# Altium PCB USB-C Power Delivery Board.PcbDoc
Units mm, origin at the board's own origin, x right, y up, seen from the top; angles counter-clockwise.
Board outline 48.4 x 56.1 mm, 4 copper layers (Top Layer, Int1 (GND), Int2 (PWR), Bottom Layer), stack 1.591 mm thick; 72 components, 47 nets, 275 pads, 146 vias.
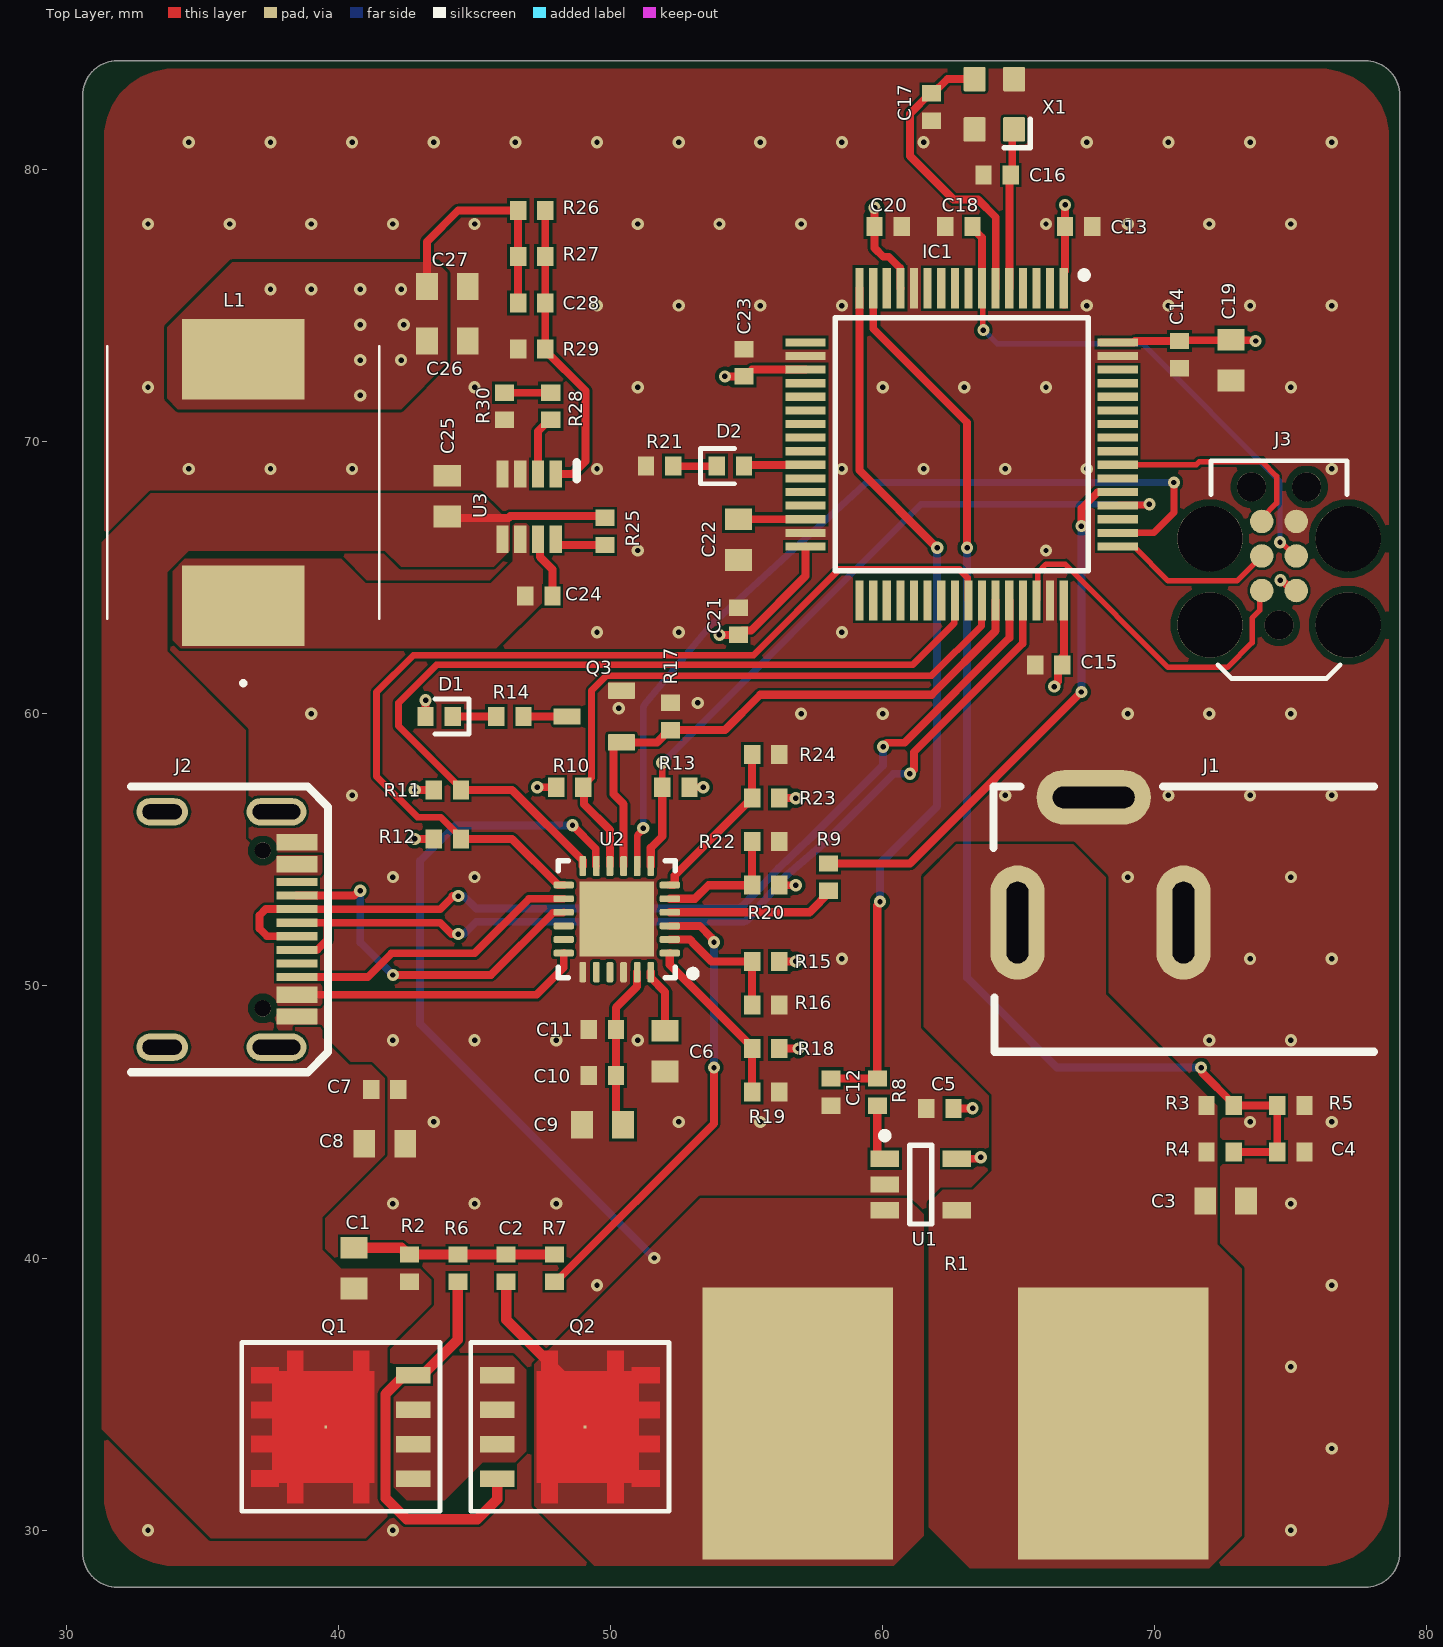
[diagram p0: Top Layer view]
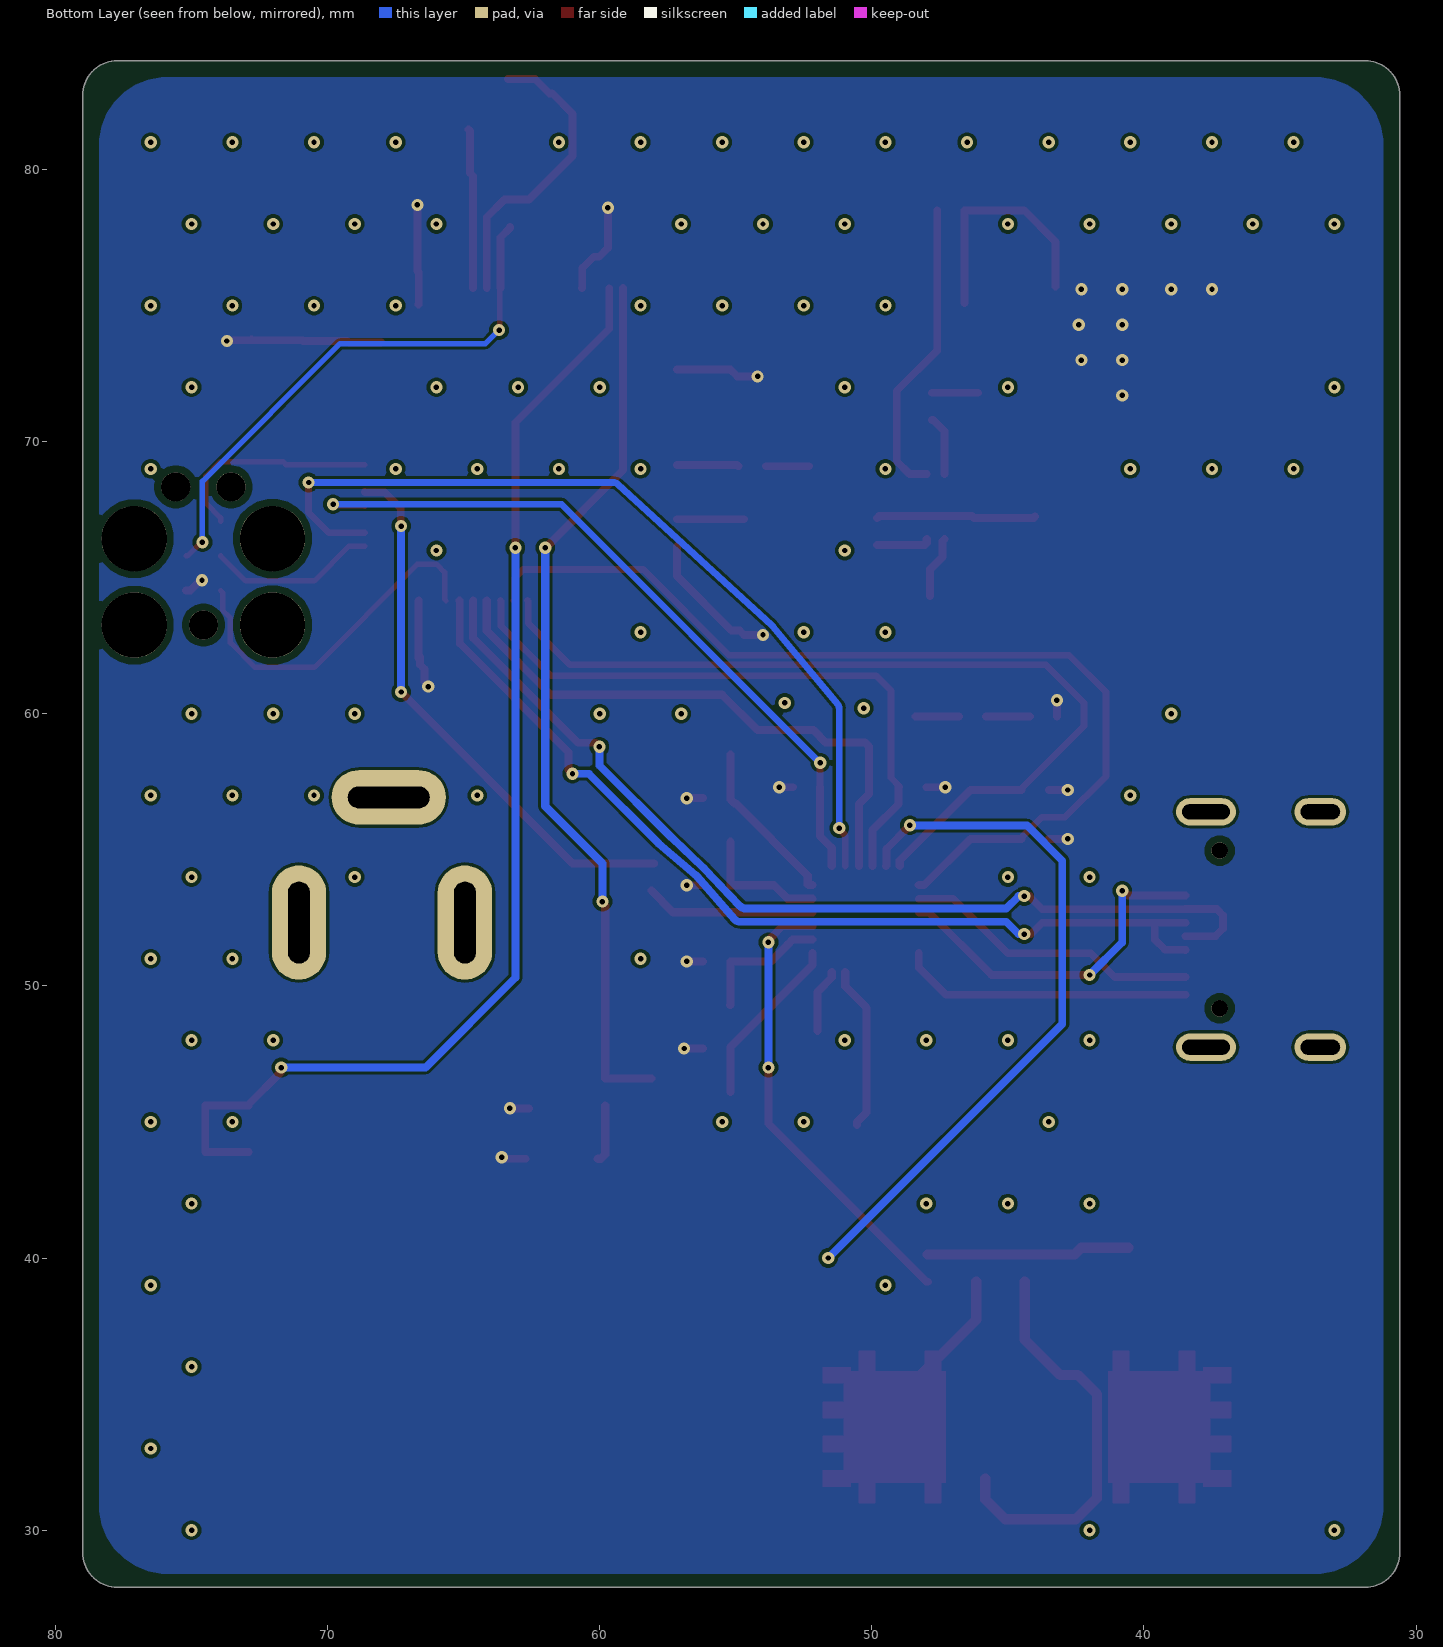
[diagram p1: Bottom Layer view, seen from below]
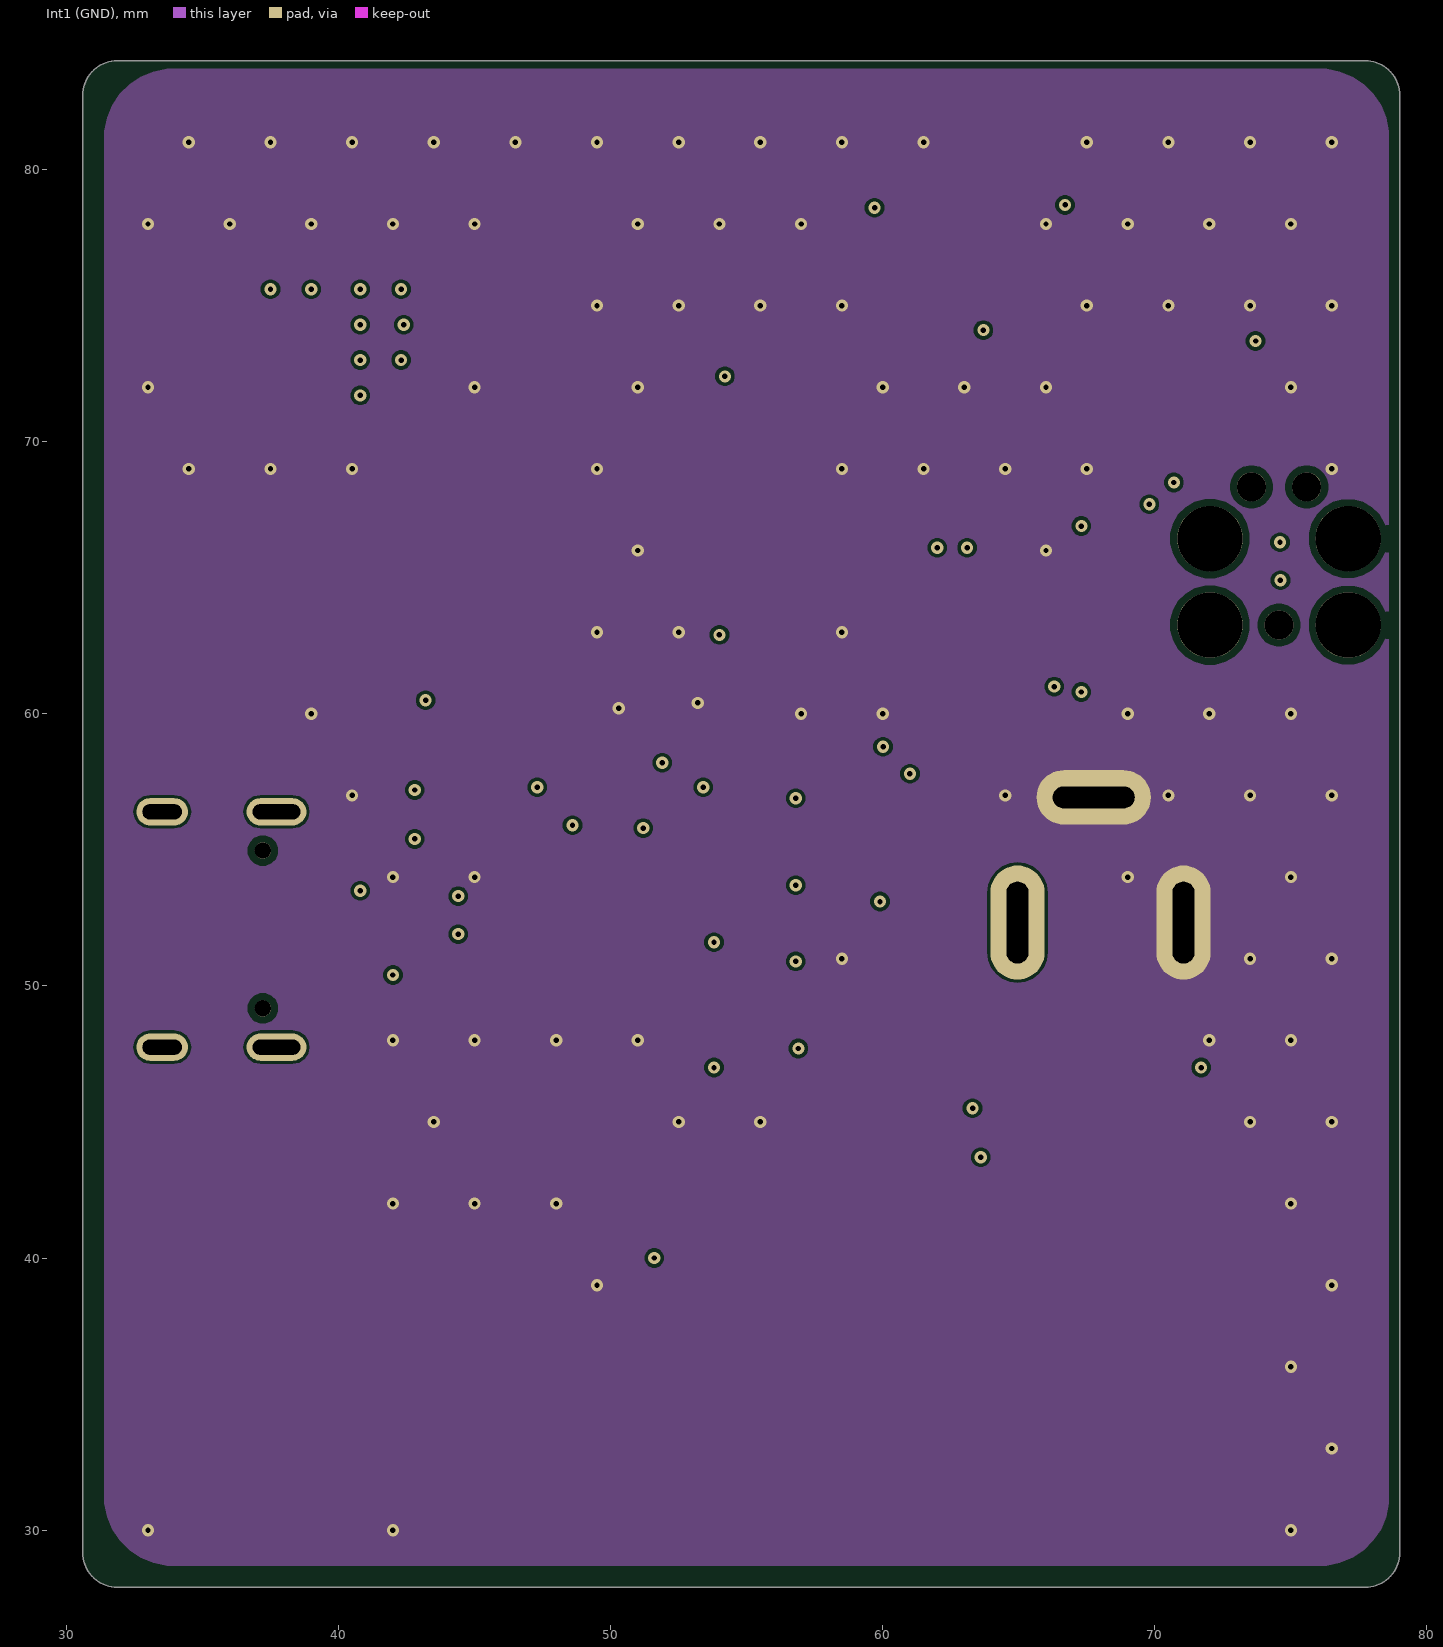
[diagram p2: Int1 (GND)]
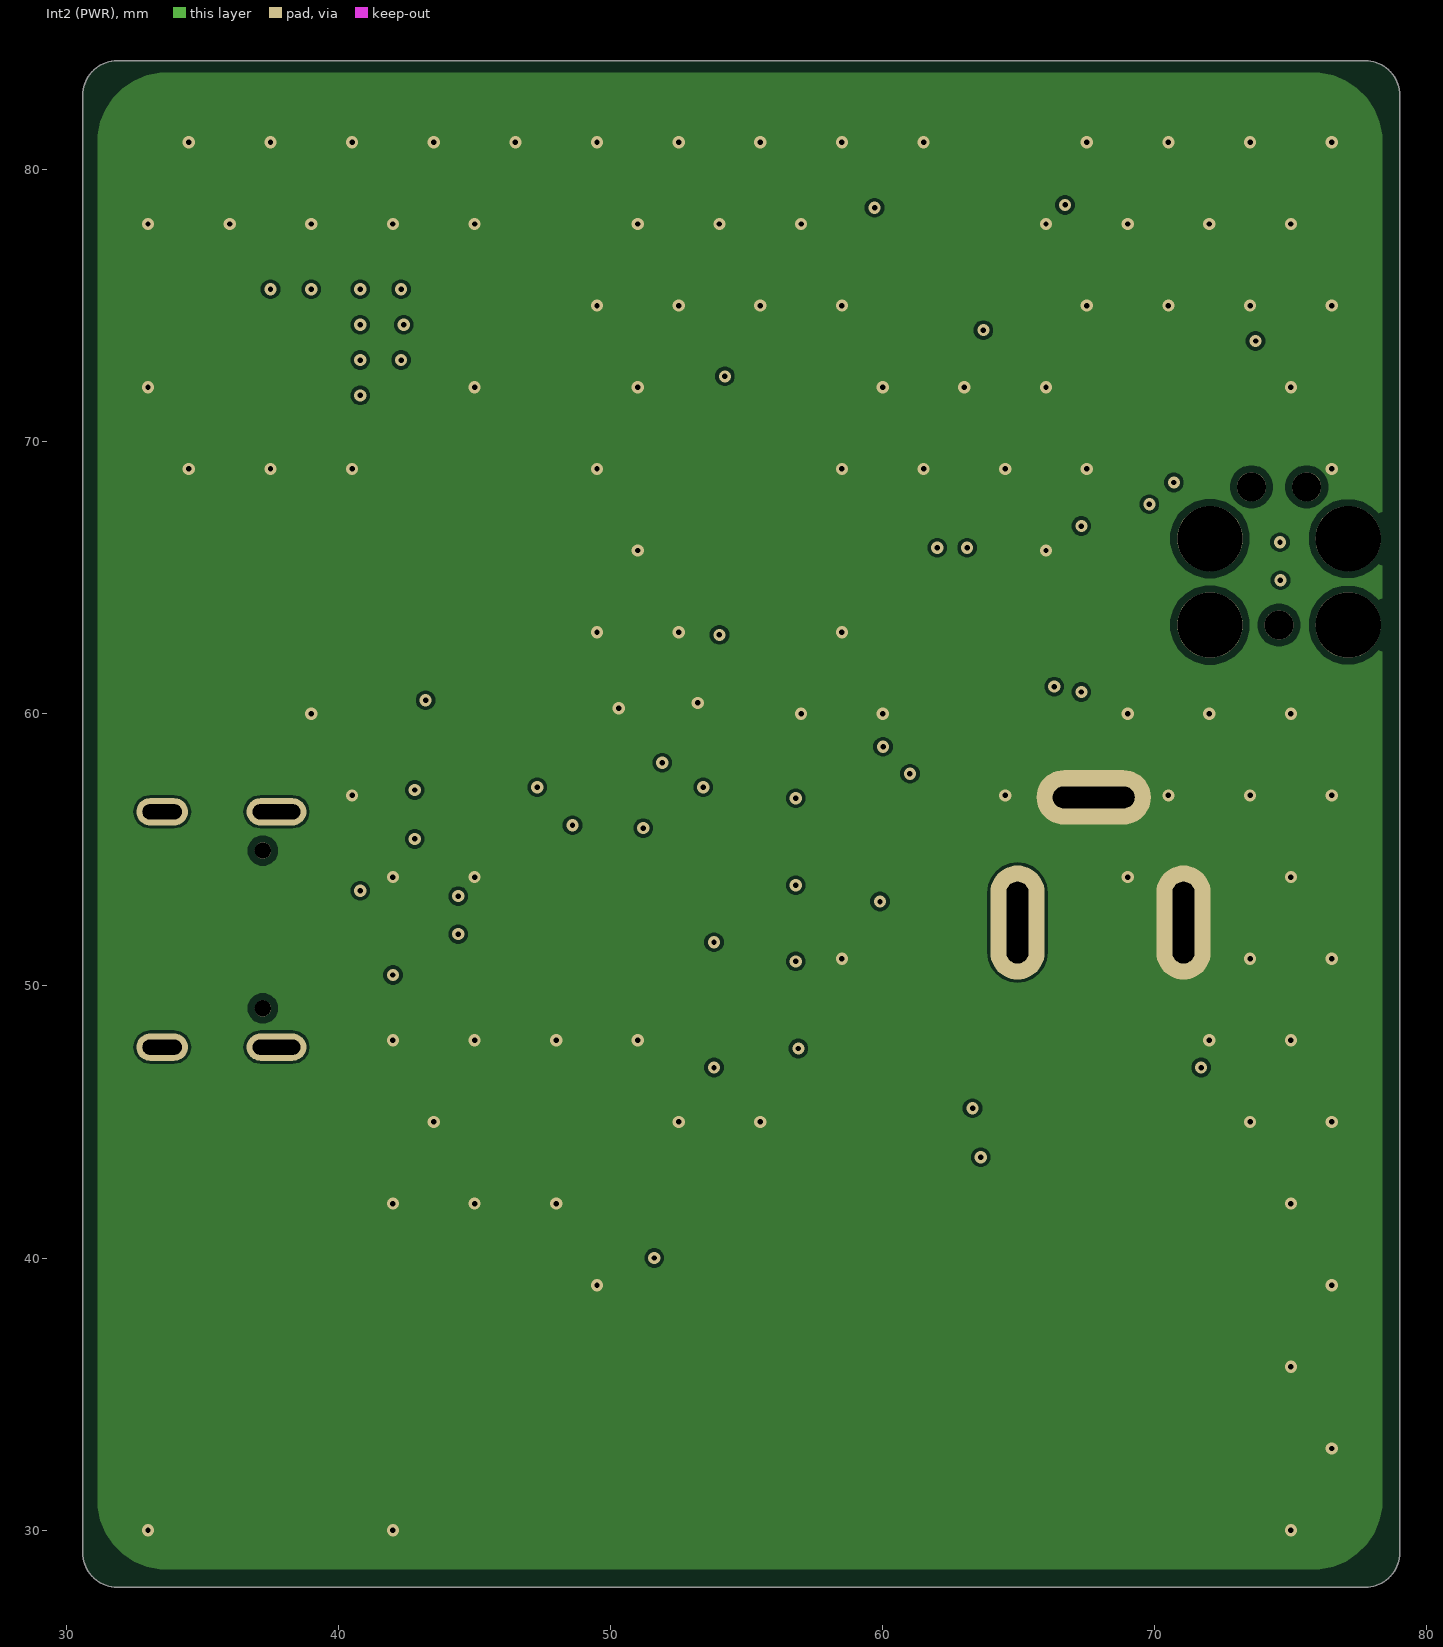
[diagram p3: Int2 (PWR)]
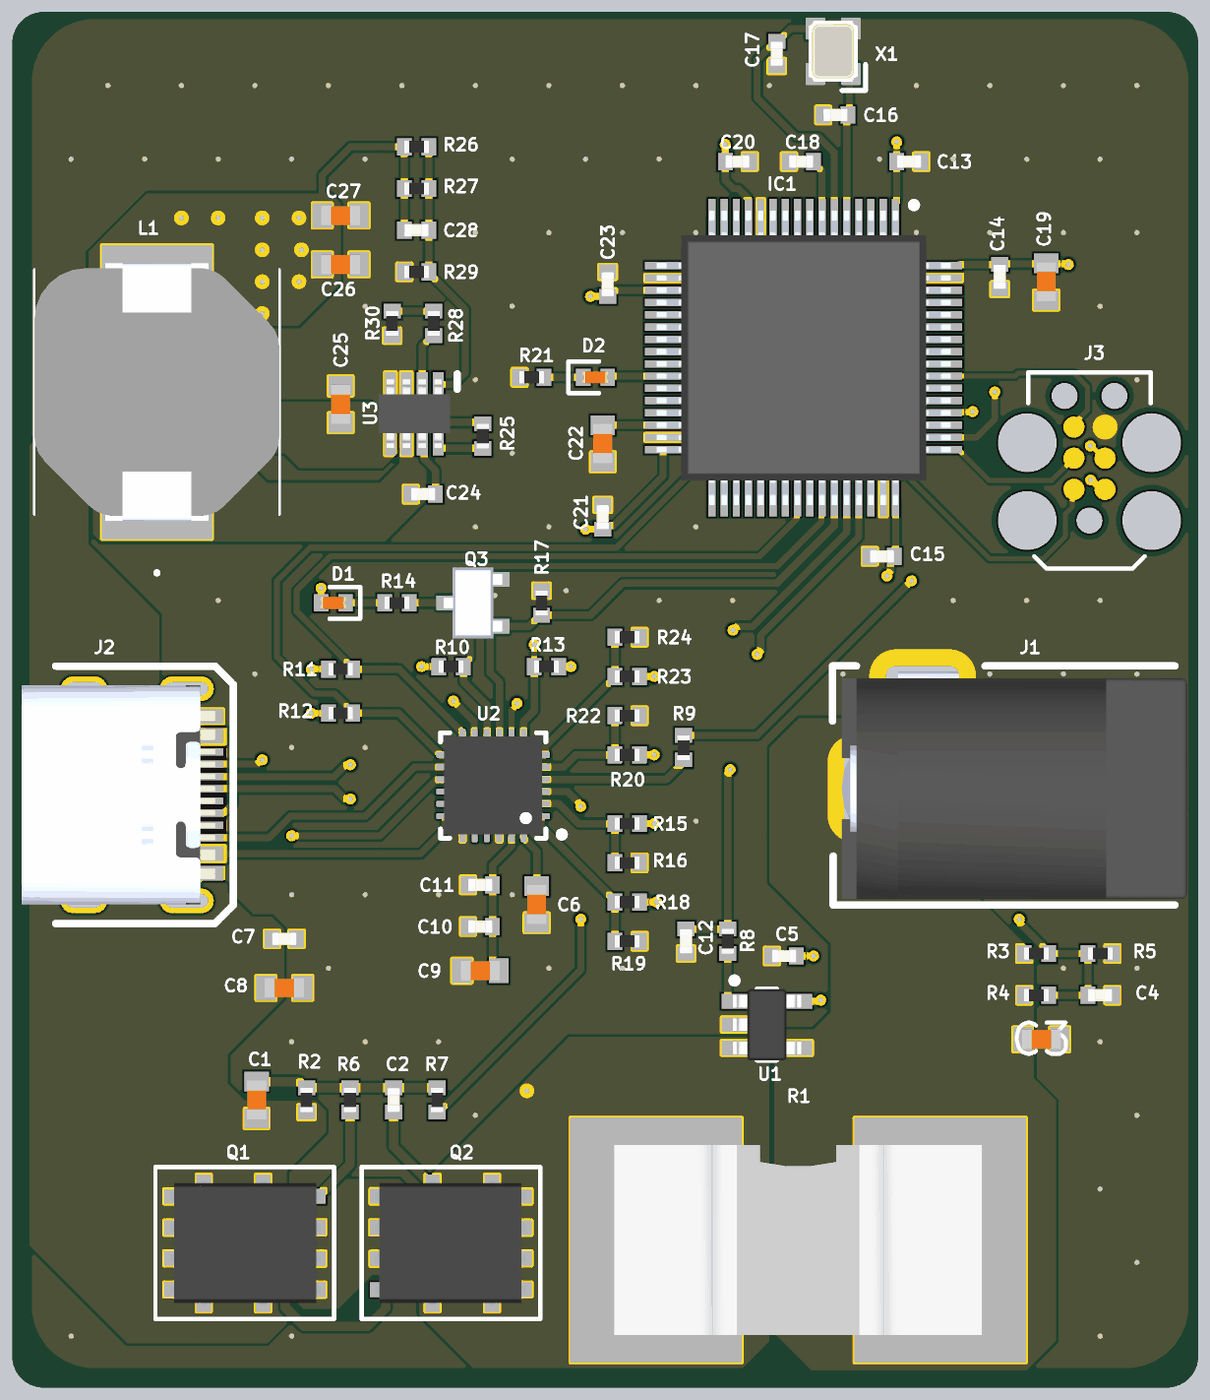
[diagram p4: 3D render of the assembled board from above, using the file's embedded part models]

## Layer stack, top to bottom
Top Solder: solder mask 0.0254, SM-001, Dk 4
Top Layer: signal copper 0.035
Dielectric 1: prepreg 0.2104, PP-017, Dk 4.3
Int1 (GND): signal copper 0.0175
Dielectric 3: core 1.065, Core-039, Dk 4.8
Int2 (PWR): signal copper 0.0175
Dielectric 5: prepreg 0.2104, PP-017, Dk 4.3
Bottom Layer: signal copper 0.035
Bottom Solder: solder mask 0.0254, SM-001, Dk 4

## Board outline
30.6,29.17 30.6,82.73 cw(c31.87,82.73) 31.87,84 77.73,84 cw(c77.73,82.73) 79,82.73 79,29.17 cw(c77.73,29.17) 77.73,27.9 31.87,27.9 cw(c31.87,29.17)

## Design rules (kind name [scope] priority, off if disabled: settings)
BoardOutlineClearance [All] p1: gap=0.2 ignorepadtopadclearanceinfootprint=FALSE
Clearance [All] p1: gap=0.102 ignorepadtopadclearanceinfootprint=FALSE except(0.127: Arc-Via Track-Via SMDPad-Via THPad-Via Via-Via Via-Fill Via-Poly Via-Region Via-Text; 0.25: Arc-Hole Track-Hole THPad-Hole Via-Hole Fill-Hole Poly-Hole Region-Hole Text-Hole)
ComponentClearance [All] p1: gap=0.102 collisioncheckmode=3 verticalgap=0.102 showdistances=TRUE
DiffPairsRouting [All] p1: maxlimit=0.203 minlimit=0.102 mostfreqgap=0.203 toplayer_mingap=0.203 toplayer_minwidth=0.287 toplayer_maxwidth=0.287 toplayer_prefwidth=0.287 bottomlayer_mingap=0.203 bottomlayer_minwidth=0.287 bottomlayer_maxwidth=0.287 bottomlayer_prefwidth=0.287 impedanceprofiledriven=TRUE impedanceprofileid={FB8E294B-22EF-4D31-B926-1CDE089D12C8} impedanceprofilevalue=90.000000 maxuncoupledlength=12.7
Height [All] p1: minheight=0 maxheight=1816.048 prefheight=12.7
HoleSize [All] p1: absolutevalues=TRUE maxlimit=6.3 minlimit=0.2 maxpercent=80.000 minpercent=20.000
HoleToHoleClearance [All] p1: gap=0.25 allowstackedmicrovias=FALSE
MinimumAnnularRing [All] p1: minimumring=0.076
MinimumSolderMaskSliver [All] p1: minsoldermaskwidth=0
PlaneClearance [All] p1: clearance=0.102
PlaneConnect PlaneConnectPowerPads [InPadClass('PowerPads')] p1: planeconnectstyle=Direct reliefexpansion=0.508 reliefentries=4 reliefconductorwidth=0.254 reliefairgap=0.254
PlaneConnect [All] p2: pad.planeconnectstyle=Relief pad.reliefexpansion=0.3 pad.reliefentries=4 pad.reliefconductorwidth=0.102 pad.reliefairgap=0.102 via.planeconnectstyle=Direct via.reliefexpansion=0.3 via.reliefentries=4 via.reliefconductorwidth=0.127 via.reliefairgap=0.127
PolygonConnect PolygonConnectPowerPads [All vs (InPadClass('PowerPads'))] p1: connectstyle=Direct reliefconductorwidth=0.254 reliefentries=4 polygonreliefangle="90 Angle" airgapwidth=0.254
PolygonConnect [All] p2: connectstyle=Direct reliefconductorwidth=0.102 reliefentries=4 polygonreliefangle="90 Angle" airgapwidth=0.102
RoutingVias [All] p1: holewidth=0.2 width=0.45 viastyle="Through Hole" minholewidth=0.2 minwidth=0.45 maxholewidth=6.3 maxwidth=6.55
SilkToSilkClearance [All] p1: silktosilkclearance=0
SilkToSolderMaskClearance [IsPad] p1: minsilkscreentomaskgap=0.102 clearancetoexposedcopper=TRUE
SolderMaskExpansion [All] p1: expansion=0.075 istentingtop=FALSE
UnRoutedNet [All] p1: checkbadconnections=TRUE
Width [All] p1: maxlimit=1816.048 minlimit=0.102 preferedwidth=0.3
19 further rules are at their usual default settings.

## Classes and differential pairs
differential pair USB_D: +USB_D_P -USB_D_N

## Components (designator, comment, footprint, x,y, rotation, side; value= is the part's Value field where it differs from the comment)
C1 "4u7" CAP_0603 40.573,39.628 r270 top
C2 "100n" CAP_0402 46.161,39.628 r270 top
C3 "4u7" CAP_0603 72.6,42.1 r180 top
C4 "100n" CAP_0402 75,43.9 r0 top
C5 "100n" CAP_0402 62.1,45.5 r0 top
C6 "4u7" CAP_0603 52,47.6 r90 top
C7 "100n" CAP_0402 41.7,46.2 r180 top
C8 "4u7" CAP_0603 41.7,44.2 r180 top
C9 "4u7" CAP_0603 49.7,44.9 r0 top
C10 "100n" CAP_0402 49.7,46.7 r0 top
C11 "100n" CAP_0402 49.7,48.4 r0 top
C12 "100n" CAP_0402 58.1,46.1 r270 top
C13 "100n" CAP_0402 67.2,77.9 r0 top
C14 "100n" CAP_0402 70.9,73.2 r270 top
C15 "100n" CAP_0402 66.1,61.8 r180 top
C16 "10p" CAP_0402 64.2,79.8 r180 top
C17 "10p" CAP_0402 61.8,82.3 r270 top
C18 "100n" CAP_0402 62.8,77.9 r180 top
C19 "4u7" CAP_0603 72.8,73 r90 top
C20 "100n" CAP_0402 60.2,77.9 r0 top
C21 "100n" CAP_0402 54.7,63.4 r90 top
C22 "4u7" CAP_0603 54.7,66.4 r90 top
C23 "100n" CAP_0402 54.9,72.9 r90 top
C24 "100n" CAP_0402 47.365,64.334 r180 top
C25 "4u7" CAP_0603 44,68 r270 top
C26 "4u7" CAP_0603 44,73.7 r0 top
C27 "4u7" CAP_0603 44,75.7 r0 top
C28 "10p" CAP_0402 47.1,75.1 r0 top
D1 "RED" LED_0402_RED 43.7,59.9 r0 top
D2 "RED" LED_0402_RED 54.4,69.1 r180 top
IC1 "STM32F401RCT6" QFP50P1200X1200X160-64N 62.9,69.9 r270 top
J1 "CON-SOCJ-2155" CON-SOCJ-2155 71.053,52.328 r90 top
J2 "TYPE-C-31-M-12" TYPE-C-31-M-12 35.62,52.074 r270 top
J3 "TC2030" TC2030-FP 74.565,65.8 r90 top
L1 "47u" SPM10065VT-220M-D 36.5,68.5 r90 top
Q1 "DMP6050SPS-13" PowerDI5060-8 40.093,33.794 r90 top
Q2 "DMP6050SPS-13" PowerDI5060-8 48.498,33.794 r270 top
Q3 "2N7002NXAKR" SSM3J338R,LF-SOT23-F 49.4,59.9 r90 top
R1 "3mR" RES_5931 62.671,33.913 r180 top
R2 "20k" RES_0402 42.605,39.628 r270 top
R3 "20k" RES_0402 72.4,45.6 r0 top
R4 "20k" RES_0402 72.4,43.9 r0 top
R5 "2k2" RES_0402 75,45.6 r0 top
R6 "2k2" RES_0402 44.383,39.628 r270 top
R7 "2k2" RES_0402 47.939,39.628 r90 top
R8 "2k2" RES_0402 59.8,46.1 r270 top
R9 "2k2" RES_0402 58,54 r270 top
R10 "2k2" RES_0402 48.5,57.3 r0 top
R11 "2k2" RES_0402 44,57.2 r0 top
R12 "2k2" RES_0402 44,55.4 r0 top
R13 "2k2" RES_0402 52.4,57.3 r180 top
R14 "2k2" RES_0402 46.3,59.9 r0 top
R15 "2k2" RES_0402 55.7,50.9 r0 top
R16 "2k2" RES_0402 55.7,49.3 r180 top
R17 "20k" RES_0402 52.2,59.9 r270 top
R18 "2k2" RES_0402 55.7,47.7 r0 top
R19 "2k2" RES_0402 55.7,46.1 r180 top
R20 "2k2" RES_0402 55.7,53.7 r0 top
R21 "2k2" RES_0402 51.8,69.1 r180 top
R22 "2k2" RES_0402 55.7,55.3 r180 top
R23 "DNP" RES_0402 55.7,56.9 r0 top
R24 "2k2" RES_0402 55.7,58.5 r180 top
R25 "20k" RES_0402 49.8,66.7 r270 top
R26 "20k" RES_0402 47.1,78.5 r180 top
R27 "20k" RES_0402 47.1,76.8 r180 top
R28 "20k" RES_0402 47.8,71.3 r90 top
R29 "2k2" RES_0402 47.1,73.4 r180 top
R30 "20k" RES_0402 46.1,71.3 r270 top
U1 "INA180A4IDBVT" SOT-23-5 61.4,42.7 r0 top
U2 "CYPD3177-24LQXQ" QFN-24-0MM5 50.225,52.455 r180 top
U3 "SY8303AIC" TSOT23-8 47.006,67.614 r180 top
X1 "16MHz" XTAL_2520 64.1,82.4 r90 top

## Footprints (in the part's own frame and the unit in brackets; to place one, negate y for a bottom-side part, rotate by r counter-clockwise, add the part's x,y. Pads: shape width x height; smd on the part's side, far side on the other; paste and mask are expansions set on the pad)
CAP_0402 [mm]
  rect 0.6x0.7 smd: 1(-0.5,0) 2(0.5,0)
  body extent -0.5,-0.26 0.5,0.26, height 0.37
CAP_0603 [mm]
  rect 0.8x1 smd: 1(-0.75,0) 2(0.75,0)
  body extent -0.8,-0.4 0.8,0.4, height 0.51
CON-SOCJ-2155 [mm]
  oval 4.2x2 hole 0.8 slot 3 at 0 deg: 1(0,6.1) 2(0,0)
  oval 2x4.2 hole 0.8 slot 3 at 90 deg: 3(4.6,3.3)
  silkscreen extent -4.75,-7 5,6.98, body extent -4.5,-7.5 4.75,6.6, height 11.11
LED_0402_RED [mm]
  rect 0.6x0.7 smd: A(-0.5,0) K(0.5,0)
  silkscreen extent -0.15,-0.65 1.1,0.65, body extent -0.51,-0.25 0.51,0.25, height 0.45
PowerDI5060-8 [mm]
  rect 0.1x0.1 smd paste-0.1 mask-0.1: 1(0,0.56)
  rect 0.61x1.27 smd: 2(1.905,-2.66) 3(-1.905,-2.66) 3(-0.635,-2.66) 3(0.635,-2.66)
  Top Layer region: -2.8,-1.045 -2.05,-1.045 -2.05,-1.22 2.05,-1.22 2.05,-1.045 2.8,-1.045 2.8,-0.445 2.05,-0.445 2.05,1.38 2.8,1.38 2.8,1.98 2.05,1.98 2.05,2.28 2.2,2.28 2.2,3.305 1.6,3.305 1.6,2.53 0.925,2.53 0.925,3.305 0.325,3.305 0.325,2.53 -0.325,2.53 -0.325,3.305 -0.925,3.305 -0.925,2.53 -1.6,2.53 -1.6,3.305 -2.2,3.305 -2.2,2.28 -2.05,2.28 -2.05,1.98 -2.8,1.98 -2.8,1.38 -2.05,1.38 -2.05,-0.445 -2.8,-0.445
  silkscreen extent -3.1,-3.64 3.1,3.65, body extent -2.58,-3.09 2.58,3.06, height 1
QFN-24-0MM5 [mm]
  rrect50% 0.75x0.25 smd mask+0.05: 1(-1.95,1.25) 2(-1.95,0.75) 3(-1.95,0.25) 4(-1.95,-0.25) 5(-1.95,-0.75) 6(-1.95,-1.25) 13(1.95,-1.25) 14(1.95,-0.75) 15(1.95,-0.25) 16(1.95,0.25) 17(1.95,0.75) 18(1.95,1.25)
  rrect50% 0.25x0.75 smd mask+0.05: 7(-1.25,-1.95) 8(-0.75,-1.95) 9(-0.25,-1.95) 10(0.25,-1.95) 11(0.75,-1.95) 12(1.25,-1.95) 19(1.25,1.95) 20(0.75,1.95) 21(0.25,1.95) 22(-0.25,1.95) 23(-0.75,1.95) 24(-1.25,1.95)
  rect 2.75x2.75 smd mask+0.3: 25(0,0)
  silkscreen extent -2.93,-2.15 2.15,2.15, body extent -2,-2 2,2, height 0.6
QFP50P1200X1200X160-64N [mm]
  rect 1.475x0.3 smd: 1(-5.738,3.75) 2(-5.738,3.25) 3(-5.738,2.75) 4(-5.738,2.25) 5(-5.738,1.75) 6(-5.738,1.25) 7(-5.738,0.75) 8(-5.738,0.25) 9(-5.738,-0.25) 10(-5.738,-0.75) 11(-5.738,-1.25) 12(-5.738,-1.75) 13(-5.738,-2.25) 14(-5.738,-2.75) 15(-5.738,-3.25) 16(-5.738,-3.75) 33(5.738,-3.75) 34(5.738,-3.25) 35(5.738,-2.75) 36(5.738,-2.25) 37(5.738,-1.75) 38(5.738,-1.25) 39(5.738,-0.75) 40(5.738,-0.25) 41(5.738,0.25) 42(5.738,0.75) 43(5.738,1.25) 44(5.738,1.75) 45(5.738,2.25) 46(5.738,2.75) 47(5.738,3.25) 48(5.738,3.75)
  rect 0.3x1.475 smd: 17(-3.75,-5.738) 18(-3.25,-5.738) 19(-2.75,-5.738) 20(-2.25,-5.738) 21(-1.75,-5.738) 22(-1.25,-5.738) 23(-0.75,-5.738) 24(-0.25,-5.738) 25(0.25,-5.738) 26(0.75,-5.738) 27(1.25,-5.738) 28(1.75,-5.738) 29(2.25,-5.738) 30(2.75,-5.738) 31(3.25,-5.738) 32(3.75,-5.738) 49(3.75,5.738) 50(3.25,5.738) 51(2.75,5.738) 52(2.25,5.738) 53(1.75,5.738) 54(1.25,5.738) 55(0.75,5.738) 56(0.25,5.738) 57(-0.25,5.738) 58(-0.75,5.738) 59(-1.25,5.738) 60(-1.75,5.738) 61(-2.25,5.738) 62(-2.75,5.738) 63(-3.25,5.738) 64(-3.75,5.738)
  silkscreen extent -6.35,-4.65 4.65,4.65, body extent -6,-6 6,6, height 1.6
RES_0402 [mm]
  rect 0.6x0.7 smd: 1(-0.5,0) 2(0.5,0)
  body extent -0.5,-0.25 0.5,0.25, height 0.3
RES_5931 [mm]
  rect 7x10 smd: 1(-5.8,0) 2(5.8,0)
  body extent -7.5,-3.88 7.5,3.87, height 1.92
SOT-23-5 [mm] "SOT23, 5-Leads, Body 2,90x2,80mm, Pitch 0,95mm, IPC Medium Density"
  rect 1.05x0.6 smd: 1(-1.325,0.95) 2(-1.325,0) 3(-1.325,-0.95) 4(1.325,-0.95) 5(1.325,0.95)
  silkscreen extent -1.45,-1.45 0.4,1.92, body extent -1.4,-1.45 1.4,1.45, height 1.45
SPM10065VT-220M-D [mm]
  rect 2.95x4.5 smd: 1(-4.525,0) 2(4.525,0)
  silkscreen extent -7.42,-5 5,5, body extent -5.25,-5 5.25,5, height 6.36
SSM3J338R,LF-SOT23-F [mm]
  rrect10% 0.6x1 smd mask+0: D(0,1) G(-0.95,-1) S(0.95,-1)
  body extent -1.45,-1.2 1.45,1.2, height 0.91
TC2030-FP [mm]
  round 0.863 smd paste-0.432: 1(-1.27,-0.635) 2(-1.27,0.635) 3(0,-0.635) 4(0,0.635) 5(1.27,-0.635) 6(1.27,0.635)
  round 2.4 hole 2.4 unplated: MH(-2.54,-2.54) MH(-2.54,2.54) MH(0.635,2.54) MH(0.635,-2.54)
  round 1.067 hole 1.067 unplated: MH(-2.54,0) MH(2.54,-1.016) MH(2.54,1.016)
  silkscreen extent -4.5,-2.5 3.5,2.5
TSOT23-8 [mm]
  rect 0.45x1 smd: 1(-0.975,-1.2) 2(-0.325,-1.2) 3(0.325,-1.2) 4(0.975,-1.2) 5(0.975,1.2) 6(0.325,1.2) 7(-0.325,1.2) 8(-0.975,1.2)
  silkscreen extent -1.75,-1.63 -1.75,-1, body extent -1.45,-1.4 1.45,1.4, height 1.01
TYPE-C-31-M-12 [mm]
  rect 0.6x1.5 smd mask+0.07: A1B12(-3.2,2.85) B1A12(3.2,2.85)
  rect 0.6x1.5 smd mask+0.14: A4B9(-2.4,2.85) B4A9(2.4,2.85)
  rect 0.3x1.5 smd mask+0.14: A5(-1.25,2.85) A6(-0.25,2.85) A7(0.25,2.85) A8(1.25,2.85) B5(1.75,2.85) B6(0.75,2.85) B7(-0.75,2.85) B8(-1.75,2.85)
  round 0.6 hole 0.6 unplated mask+0.3: MH(-2.9,1.6) MH(2.9,1.6)
  oval 1x2.2 hole 0.55 slot 1.75 at 90 deg mask+0.05: SH(-4.325,2.1) SH(4.325,2.1)
  oval 1x1.9 hole 0.55 slot 1.45 at 90 deg mask+0.05: SH(-4.325,-2.1) SH(4.325,-2.1)
  silkscreen extent -5.25,-3.25 5.25,4, body extent -4.47,-4.65 4.47,3.25, height 3.32
XTAL_2520 [mm]
  rrect10% 0.9x0.8 smd mask+0: 1(-0.925,-0.725) 2(0.925,-0.725) 3(0.925,0.725) 4(-0.925,0.725)
  silkscreen extent -1.6,-1.33 -0.54,-0.36, body extent -1.25,-1 1.25,1, height 0.8

## Part data
C1 C3 C6 C8 C9 C19 C22 C25 C26 C27: library part CAP_0603_50V, "Capacitor SMD 0603 50V"
C2 C4 C5 C7 C10 C11 C12 C13 C14 C15 C16 C17 C18 C20 C21 C23 C24 C28: library part CAP_0402_50V, "Capacitor SMD 0402 50V"
D1 D2: library part LED_0402_RED, "LED 0402 RED SMD"
IC1: "Integrated Circuit", Manufacturer_Name=STMicroelectronics, Mouser Part Number=511-STM32F401RCT6, Arrow Part Number=STM32F401RCT6, Arrow Price/Stock=https://www.arrow.com/en/products/stm32f401rct6/stmicroelectronics?region=nac, Datasheet Link=http://www.st.com/web/en/resource/technical/document/datasheet/DM00086815.pdf, Height=1.6mm, Manufacturer_Part_Number=STM32F401RCT6, Mouser Price/Stock=https://www.mouser.co.uk/ProductDetail/STMicroelectronics/STM32F401RCT6?qs=DqCdCwOw4%2F4JITyspz8omA%3D%3D
J1: "DC Barrell Jack 2.1mm 30V 2.5A THT", Manufacturer=Gravitech, Manufacturer Part Number=CON-SOCJ-2155
J2: "USB Type C Connector Horizontal SMT", Manufacturer="Koren Hroparts", Manufacturer Part Number=TYPE-C-31-M-12
J3: "Tag-Connect No-Solder SWD Debug Connector DO NOT PLACE", Manufacturer=Tag-Connect, Manufacturer Part Number=TC2030
L1: library part SPM10065VT-470M-D, "Inductor SMD 47uH 4A 20%", Manufacturer=TDK, Manufacturer Part Number=SPM10065VT-470M-D
Q1 Q2: "MOSFET P-Channel Vds=60V Vgs=+-20V Id=26A Rds(on", Manufacturer="Diodes Incorporated", Manufacturer Part Number=DMP6050SPS-13
Q3: "MOSFET N-Channel Vds=60V Id=300mA with ESD Protection", Manufacturer=Nexperia, Manufacturer Part Number=2N7002NXAKR
R1: library part RES_5931, "Current Sense Resistor SMD 0805"
R2 R3 R4 R5 R6 R7 R8 R9 R10 R11 R12 R13 R14 R15 R16 R17 R18 R19 R20 R21 R22 R23 R24 R25 R26 R27 R28 R29 R30: library part RES_0402, "Resistor SMD 0402"
U1: "Current Sense Amplifier 200V/V Gain 105kHz BW SOT-23-5", Manufacturer="Texas Instruments", Manufacturer Part Number=INA180A4IDBVT
U2: "USB Type-C Port Controller for Power Sinks", Manufacturer="Cypress Semicon", Distributor Link=https://www.lcsc.com/product-detail/USB-ICs_Cypress-Semicon-CYPD3177-24LQXQ_C2959321.html, Manufacturer Part Number=CYPD3177-24LQXQ
U3: "High Efficiency Fast Response, 3A, 40V Input Synchronous Step Down Regulator", LCSC=C97054, Manufacturer=Silergy, Distributor Link=https://www.lcsc.com/product-detail/DC-DC-Converters_Silergy-Corp-SY8303AIC_C97054.html, Manufacturer Part Number=SY8303AIC
X1: library part XTAL_2520, "Crystal SMD 2520"

## Via types
v1: diameter 0.45, hole 0.2, Top Layer to Bottom Layer, tented both sides, 97 vias
v2: diameter 0.45, hole 0.2, Top Layer to Bottom Layer, 49 vias

## Nets (pads, with @x,y where several pads share a name; then routed paths per layer and width w, separated by ;. In a path a pad name is that pad's centre, name@x,y a point inside that pad or via, vN(x,y) a via of type N, cw(c..) or ccw(c..) an arc to the next point about the centre after c; other vN are vias at no path point)
+3V3: C9.2 C10.2 C11.2 U2.23 | length 6.1
  Top Layer w0.3: C9.2@50.55,44.9 50.55,45 50.2,45.35 C10.2 C11.2 50.2,49.2 50.975,49.975 U2.23
+3V3_MCU: C5.2 C13.1 C14.1 C15.1 C19.2 C20.1 C21.1 C23.1 C26.1 C27.1 C28.1 D1.A IC1.1 IC1.13 IC1.19 IC1.32 IC1.48 IC1.64 J3.1 L1.2 R10.1 R11.1 R12.1 R13.1 R15.2 R18.2 R20.2 R23.2 R26.2 R27.2 U1.5 | length 41.4
  Top Layer w0.287: v2(42.8,55.4) R12.1 ; v2(42.8,57.2) R11.1 ; D1.A v2(43.2,60.5) ; C27.1 43.25,77.35 44.4,78.5 R26.2 R27.2 C28.1 ; v2(47.3,57.3) R10.1 ; R13.1 v2(53.4,57.3) ; v2(54,62.9) C21.1 54.857,63.057 55.157,63.057 57.162,65.062 IC1.32 ; v2(54.2,72.4) C23.1 54.95,72.4 55.2,72.65 IC1.19 ; R18.2 v2(56.9,47.7) ; R15.2 v2(56.8,50.9) ; R20.2 v2(56.8,53.7) ; R23.2 v2(56.8,56.9) ; v2(59.7,78.6) C20.1 59.7,77.12 60.022,76.799 60.223,76.799 60.643,76.379 60.643,75.645 IC1.13 ; C5.2 v2(63.3,45.5) ; U1.5 63.55,43.65 ccw(c63.55,43.7) v2(63.6,43.7) ; v2(66.3,61) 66.3,61.044 66.443,61.188 66.443,61.643 C15.1 66.6,62.1 66.657,62.043 66.657,64.155 IC1.48 ; IC1.1@66.657,75.044 66.65,75.05 IC1.1 66.65,76.226 66.7,76.276 C13.1 v2(66.7,78.7) ; IC1.64@68.044,73.657 68.05,73.65 IC1.64 69.226,73.65 69.276,73.7 C14.1 70.925,73.725 72.775,73.725 C19.2 72.825,73.725 73.675,73.725 v2(73.7,73.7) ; v2(74.616,64.909) 74.647,64.877 74.697,64.877 75.044,64.53 J3.1
  other v2: 40.8,71.7 40.8,73 42.3,73 40.8,74.3 42.4,74.3 37.5,75.6 39,75.6 40.8,75.6 42.3,75.6
+VBUS: C1.2 C7.2 C8.2 C25.2 J2.A4B9 J2.B4A9 Q1.1 R2.2 R25.1 U2.18 U3.5 | length 16.6
  Top Layer w0.287: J2.B4A9 47.274,49.674 48.275,50.675 U2.18
  Top Layer w0.3: C25.2 44.05,67.2 46.247,67.2 46.311,67.264 49.736,67.264 R25.1
+VBUS_PD: C2.2 Q2.1 R1.2 U1.3 U2.11 | length 32.7
  Top Layer w0.287: v2(48.6,55.9) 49.457,55.043 49.457,54.423 U2.11
  Top Layer w0.381: C2.2 46.161,37.736 49.058,34.839 Q2.1
  Bottom Layer w0.287: v2(48.6,55.9) 44.3,55.9 43,54.6 43,48.6 v2(51.6,40)
+VCONN: C3.2 J1.1 R1.1 R3.1 R4.1 U1.4
ADC_IN1: C4.1 IC1.15 R3.2 R4.2 R5.1 | length 43.5
  Top Layer w0.287: IC1.15 59.65,74.15 63.1,70.7 v2(63.1,66.1) ; v2(71.7,47) 71.731,46.969 71.731,46.819 72.9,45.65 R3.2 R5.1 C4.1 R4.2
  Bottom Layer w0.287: v2(63.1,66.1) 63.1,50.3 66.4,47 v2(71.7,47)
ADC_IN2: C12.1 IC1.16 R8.1 | length 32.8
  Top Layer w0.3: C12.1 R8.1 59.8,52.959 59.9,53.059 v2(59.9,53.1) ; IC1.16 59.15,68.95 v2(62,66.1)
  Bottom Layer w0.3: v2(59.9,53.1) 59.9,54.5 62,56.6 v2(62,66.1)
BS: C24.1 U3.7 | length 2.3
  Top Layer w0.3: U3.7 47.406,66.339 47.406,65.769 47.865,65.31 C24.1
BUCK_EN: R25.2 U3.8 | length 2
  Top Layer w0.3: U3.8 47.981,66.275 48.056,66.2 R25.2
BUCK_EN_R: R28.2 R30.1 | length 1.7
  Top Layer w0.287: R30.1 R28.2
Fb: C28.2 R26.1 R27.1 R29.1 U3.1 | length 11.1
  Top Layer w0.287: R26.1 R27.1 R29.1 47.6,73.35 49.081,71.869 49.081,69.281 48.614,68.814 U3.1
Fs: R28.1 U3.2 | length 2.2
  Top Layer w0.287: U3.2 47.331,70.381 47.75,70.8 R28.1
GND: C3.1 C4.2 C5.1 C6.1 C7.1 C8.1 C9.1 C10.1 C11.1 C12.2 C13.2 C14.2 C15.2 C16.2 C17.2 C18.2 C19.1 C20.2 C21.2 C22.1 C23.2 C25.1 C26.2 C27.2 IC1.12 IC1.18 IC1.31 IC1.47 IC1.63 J1.2 J1.3 J2.A1B12 J2.B1A12 J3.5 Q3.S R5.2 R16.1 R17.1 R19.1 R21.2 R22.1 R24.1 R29.2 R30.2 U1.2 U2.19 U2.22 U2.25 U3.3 U3.4 X1.2 X1.4
  other v1: 33,30 42,30 75,30 76.5,33 75,36 49.5,39 76.5,39 42,42 45,42 48,42 75,42 43.5,45 52.5,45 55.5,45 73.5,45 76.5,45 42,48 45,48 48,48 51,48 72,48 75,48 58.5,51 73.5,51 76.5,51 42,54 45,54 69,54 75,54 40.5,57 64.5,57 70.5,57 73.5,57 76.5,57 39,60 57,60 60,60 69,60 72,60 75,60 50.3,60.2 53.2,60.4 49.5,63 52.5,63 58.5,63 51,66 66,66 34.5,69 37.5,69 40.5,69 49.5,69 58.5,69 61.5,69 64.5,69 67.5,69 76.5,69 33,72 45,72 51,72 60,72 63,72 66,72 75,72 49.5,75 52.5,75 55.5,75 58.5,75 67.5,75 70.5,75 73.5,75 76.5,75 33,78 36,78 39,78 42,78 45,78 51,78 54,78 57,78 66,78 69,78 72,78 75,78 34.5,81 37.5,81 40.5,81 43.5,81 46.5,81 49.5,81 52.5,81 55.5,81 58.5,81 61.5,81 67.5,81 70.5,81 73.5,81 76.5,81
HSEIN: C16.1 IC1.5 X1.1 | length 5.9
  Top Layer w0.287: IC1.5 64.657,75.645 64.657,79.757 C16.1 64.762,79.862 64.762,81.412 X1.1
HSEOUT: C17.1 IC1.6 X1.3 | length 11.1
  Top Layer w0.287: X1.3 62.375,83.325 61.85,82.8 61.75,82.8 61,82.05 61,80.5 62.6,78.9 63.5,78.9 64.15,78.25 IC1.6
I2C3_SCL: IC1.41 R12.2 U2.13 | length 36.2
  Top Layer w0.25: R12.2 44.5,55.45 43.75,56.2 42.9,56.2 41.4,57.7 41.4,60.8 42.752,62.152 55.252,62.152 58.4,65.3 62.82,65.3 63.125,64.995 63.125,64.187 IC1.41
  Top Layer w0.3: R12.2 46.38,55.4 48.075,53.705 U2.13
I2C3_SDA: IC1.40 R11.2 U2.12 | length 32.4
  Top Layer w0.25: R11.2 44.5,57.25 42.204,59.546 42.204,60.404 43.6,61.8 61.1,61.8 62.625,63.325 62.625,64.137 IC1.40
  Top Layer w0.3: R11.2 46.38,57.2 48.975,54.605 U2.12
ISINK_FINE: R23.1 R24.2 U2.6 | length 6.2
  Top Layer w0.3: U2.6 52.333,53.705 52.358,53.73 52.358,54.058 55,56.7 55.05,56.7 55.2,56.85 R23.1 R24.2
ISNK_COARSE: R20.1 R22.2 U2.5 | length 4.8
  Top Layer w0.3: U2.5 53.105,53.205 53.6,53.7 R20.1 R22.2
LED_A: D2.A IC1.26 | length 2.3
  Top Layer w0.287: D2.A 54.943,69.143 57.155,69.143 IC1.26
LED_K: D2.K R21.1 | length 1.6
  Top Layer w0.287: R21.1 D2.K
Lx: C24.2 L1.1 U3.6
NetD1_K: D1.K R14.1 | length 1.6
  Top Layer w0.3: D1.K R14.1
NetJ2_A5: J2.A5 U2.15 | length 13.2
  Top Layer w0.287: J2.A5 40.58,53.324 40.756,53.5 v2(40.8,53.5) ; v2(42,50.4) 45.6,50.4 47.887,52.687 48.257,52.687 U2.15
  Bottom Layer w0.287: v2(40.8,53.5) 40.8,51.6 v2(42,50.4)
NetJ2_B5: J2.B5 U2.14 | length 11
  Top Layer w0.287: J2.B5 41.076,50.324 41.952,51.2 45,51.2 47.005,53.205 U2.14
NetQ1_3: Q1.3 Q2.3
NetQ3_D: Q3.D R14.2 | length 1.6
  Top Layer w0.3: R14.2 Q3.D
NetR8_2: R8.2 U1.1 | length 2.1
  Top Layer w0.3: R8.2 59.8,43.8 59.95,43.65 U1.1
NRST: C18.1 IC1.7 J3.3 | length 20.2
  Top Layer w0.2: IC1.7 63.675,75.613 63.675,74.125 v2(63.7,74.1) ; v2(74.6,66.3) 74.65,66.3 75.15,65.8 J3.3
  Top Layer w0.287: C18.1 63.3,77.85 63.65,77.5 IC1.7
  Bottom Layer w0.2: v2(63.7,74.1) 64.2,73.6 69.538,73.6 74.6,68.538 v2(74.6,66.3)
PD_FAULT: IC1.43 Q3.G R17.2 U2.9 | length 21.5
  Top Layer w0.3: U2.9 50.475,56.678 50.1,57.053 50.1,58.8 50.25,58.95 51.7,58.95 52.15,59.4 R17.2@52.25,59.4 ; R17.2 54.2,59.4 55.5,60.7 61.8,60.7 64.15,63.05 IC1.43
PD_FLIP: IC1.42 R10.2 U2.10 | length 23.2
  Top Layer w0.25: R10.2 49,57.35 49.3,57.65 49.3,60.853 49.847,61.4 61.8,61.4 63.625,63.225 63.625,64.137 IC1.42
  Top Layer w0.3: R10.2 49.024,57.276 49.024,56.676 49.975,55.725 U2.10
PD_GPIO: IC1.50 U2.8 | length 32.4
  Top Layer w0.25: U2.8 50.975,55.521 51.2,55.746 v2(51.2,55.8) ; IC1.50 69.95,66.65 70.7,67.4 v2(70.7,68.5)
  Bottom Layer w0.25: v2(51.2,55.8) 51.2,60.196 cw(c51.45,60.196) 51.258,60.357 53.634,63.205 cw(c54,62.9) 53.678,63.252 59.335,68.434 cw(c59.504,68.25) 59.504,68.5 v2(70.7,68.5)
PD_INT: IC1.52 R13.2 U2.7 | length 27
  Top Layer w0.25: R13.2 v2(51.9,58.2) ; IC1.52 68.663,67.675 69.775,67.675 v2(69.8,67.7)
  Top Layer w0.3: U2.7 51.475,55.075 51.9,55.5 R13.2
  Bottom Layer w0.25: v2(51.9,58.2) 61.4,67.7 v2(69.8,67.7)
PD_SAFE: IC1.53 R9.1 | length 20.2
  Top Layer w0.287: R9.1 61,54.5 v2(67.3,60.8) ; v2(67.3,66.9) 67.309,66.909 67.309,67.555 67.897,68.143 68.631,68.143 IC1.53
  Bottom Layer w0.287: v2(67.3,60.8) v2(67.3,66.9)
PD_SAFE_R: R9.2 U2.4 | length 6.3
  Top Layer w0.3: U2.4 57.305,52.705 R9.2@58.1,53.5
PDC_VCCD: C6.2 U2.24 | length 2.4
  Top Layer w0.3: U2.24 51.475,50.305 52,49.78 C6.2
SWCLK: IC1.49 J3.4 | length 6.2
  Top Layer w0.2: IC1.49 69.226,66.15 70.491,64.885 73.015,64.885 J3.4
SWDIO: IC1.46 J3.2 | length 13.1
  Top Layer w0.2: IC1.46 65.7,64.212 65.7,65.2 66,65.5 66.7,65.5 70.49,61.71 72.667,61.71 73.575,62.618 73.575,63.519 73.854,63.799 73.854,64.454 J3.2
SWO: IC1.55 J3.6 | length 8
  Top Layer w0.2: IC1.55 71.521,69.15 71.638,69.267 73.933,69.267 74.476,68.724 74.476,67.742 73.93,67.197 J3.6
USB_D_N: IC1.44 J2.A7 J2.B7 | length 35.9
  Top Layer w0.287: J2.A7 37.376,51.824 37.1,52.1 37.1,52.6 37.324,52.824 J2.B7 ; J2.B7@38.48,52.817 39.174,52.817 39.178,52.814 43.735,52.814 44.194,53.273 44.194,53.3 v2(44.4,53.3) ; v2(60.012,58.788) 60.158,58.933 60.799,58.933 64.655,62.789 64.655,64.157 IC1.44
  Bottom Layer w0.287: v2(44.4,53.3) 44.606,53.3 45.06,52.846 54.635,52.846 ccw(c54.635,53.133) 54.842,52.935 56.162,54.312 cw(c56.8,53.7) 56.191,54.34 57.358,55.451 ccw(c57.16,55.658) 57.363,55.456 60.012,58.105 v2(60.012,58.788)
USB_D_P: IC1.45 J2.A6 J2.B6 | length 35.1
  Top Layer w0.287: J2.B6 38.477,51.331 39.223,51.331 39.6,51.708 39.6,52.324 ; J2.A6 39.6,52.324 ; v2(44.4,51.903) 44.161,51.903 43.74,52.324 39.6,52.324 ; v2(61,57.8) 61.146,57.946 61.146,58.587 65.145,62.586 65.145,64.157 IC1.45
  Bottom Layer w0.287: v2(44.4,51.903) 44.606,51.903 45.06,52.357 54.838,52.357 ccw(c54.838,52.643) 55.054,52.455 56.427,54.026 cw(c56.8,53.7) 56.478,54.076 57.836,55.237 ccw(c57.65,55.455) 57.853,55.253 60.4,57.8 v2(61,57.8)
VBUS_FET_EN: R7.1 U2.3 | length 16.9
  Top Layer w0.287: R7.1 47.989,39.128 53.8,44.939 v2(53.8,47) ; U2.3 53.276,52.205 53.705,51.776 53.705,51.739 53.8,51.644 v2(53.8,51.6)
  Bottom Layer w0.287: v2(53.8,47) v2(53.8,51.6)
VBUS_FET_GATE: Q1.2 Q2.2 R6.2 | length 14.9
  Top Layer w0.381: R6.2 44.383,36.999 43.083,35.699 42.423,35.699 41.728,35.003 41.728,31.172 42.5,30.4 45.1,30.4 45.838,31.138 Q2.2
VBUS_FET_GATE_Divider: C1.1 C2.1 R2.1 R6.1 R7.2 | length 7.5
  Top Layer w0.381: C1.1 42.305,40.378 42.555,40.128 R2.1 R6.1 C2.1 R7.2
VBUS_MAX: R15.1 R16.2 U2.2 | length 5
  Top Layer w0.3: U2.2 52.912,51.705 53.088,51.529 53.088,51.522 53.71,50.9 R15.1 55.2,49.326 55.218,49.308 55.211,49.3 R16.2
VBUS_MIN: R18.1 R19.2 U2.1 | length 6.4
  Top Layer w0.3: U2.1 52.175,50.775 55.2,47.75 R18.1 R19.2
VCAP: C22.2 IC1.30 | length 2.5
  Top Layer w0.287: C22.2 IC1.30
pads on no net: IC1.2 IC1.3 IC1.4 IC1.8 IC1.9 IC1.10 IC1.11 IC1.14 IC1.17 IC1.20 IC1.21 IC1.22 IC1.23 IC1.24 IC1.25 IC1.27 IC1.28 IC1.29 IC1.33 IC1.34 IC1.35 IC1.36 IC1.37 IC1.38 IC1.39 IC1.51 IC1.54 IC1.56 IC1.57 IC1.58 IC1.59 IC1.60 IC1.61 IC1.62 J2.A8 J2.B8 J2.MH J2.SH J3.MH U2.16 U2.17 U2.20 U2.21

## Polygon pours and split planes (outlines as drawn)
GND on Top Layer "GND_L01_P013" (solid, pour order 13): 31.4,81.16 cw(c33.94,81.16) 33.94,83.7 76.06,83.7 cw(c76.06,81.16) 78.6,81.16 78.6,31.24 cw(c76.06,31.24) 76.06,28.7 33.94,28.7 cw(c33.94,31.24) 31.4,31.24 31.4,67
+VBUS on Top Layer "NONET_L04_P-001" (solid, pour order 0): 36.6,55.4 36.6,59.4 33.7,62.3 33.7,65.2 34.5,66 41.7,66 42.3,65.4 45.7,65.4 46.3,66 46.3,67.03 45.23,68.1 33.1,68.1 31.3,66.3 31.3,33.7 35.3,29.7 41,29.7 41.8,30.5 41.8,36.7 43.4,38.3 43.4,39.2 43,39.6 40.1,39.6 39.4,40.3 39.4,41.5 41.7,43.8 41.7,46.6 41.2,47.1 40.4,47.1 39.4,48.1 39.4,54.8 37.2,54.8
+VCONN on Top Layer "+VCONN_L01_P003" (solid, pour order 3): 72.3,45.6 72.3,40.5 73.2,39.6 73.2,29.8 72,28.6 63.2,28.6 61.7,30.1 61.7,42 62.2,42.5 63.3,42.5 64,43.2 64,46 61.5,48.5 61.5,54 62.7,55.2 67,55.2 68.2,54 68.2,49.7
+VBUS_PD on Top Layer "+VBUS_PD_L01_P002" (solid, pour order 2): 61.5,41.6 61.5,29.8 60.4,28.7 49.4,28.7 47.2,30.9 47.2,36.1 53.3,42.2 60.9,42.2
+3V3_MCU on Top Layer "+3V3_MCU_L01_P005" (solid, pour order 5): 42.3,71.2 44,72.9 44,76.2 43.6,76.6 36.1,76.6 33.7,74.2 33.7,71.6 34.1,71.2
Lx on Top Layer "LX_L01_P004" (solid, pour order 4): 40.1,65.7 41,64.8 45.6,64.8 46.4,65.6 46.4,66.9 46.5,67 46.9,67 47.5,66.4 47.5,64.1 45.8,62.4 34.2,62.4 33.9,62.7 33.9,65.4 34.2,65.7
NetQ1_3 on Top Layer "NONET_L04_P-001" (solid, pour order 1): 41.9,34.9 43.4,36.4 46.4,36.4 46.9,35.9 46.9,32.9 46.5,32.5 45.3,32.5 43.9,31.1 42.5,31.1 41.9,31.7
GND on Int1 (GND) "GND_L02_P008" (solid, pour order 8): 31.4,81.16 cw(c33.94,81.16) 33.94,83.7 76.06,83.7 cw(c76.06,81.16) 78.6,81.16 78.6,31.24 cw(c76.06,31.24) 76.06,28.7 33.94,28.7 cw(c33.94,31.24) 31.4,31.24 31.4,67
GND on Int2 (PWR) "GND_L03_P010" (solid, pour order 10): 31.15,81.018 cw(c33.69,81.018) 33.69,83.558 75.81,83.558 cw(c75.81,81.018) 78.35,81.018 78.35,31.098 cw(c75.81,31.098) 75.81,28.558 33.69,28.558 cw(c33.69,31.098) 31.15,31.098 31.15,66.858
+3V3_MCU on Bottom Layer "+3V3_MCU_L04_P011" (solid, pour order 11): 31.2,80.86 cw(c33.74,80.86) 33.74,83.4 75.86,83.4 cw(c75.86,80.86) 78.4,80.86 78.4,30.94 cw(c75.86,30.94) 75.86,28.4 33.74,28.4 cw(c33.74,30.94) 31.2,30.94 31.2,66.7

## Silkscreen, mask and mechanical layers (free items; w line width, h text height)
Mechanical 1:
  lines w0.254: 30.6,29.17 ccw(c31.87,29.17) 31.87,27.9 77.73,27.9 ccw(c77.73,29.17) 79,29.17 79,82.73 ccw(c77.73,82.73) 77.73,84 31.87,84 ccw(c31.87,82.73) 30.6,82.73 30.6,46.5 30.6,29.17

## Text inside footprints (layer, text, board x,y; h text height)
D1: Mechanical 13 "+" at 41.817,60.408 h0.5
D2: Mechanical 13 "+" at 56.283,68.592 h0.5 r180
Q1: Mechanical 13 "G" at 43.118,35.427 h0.8 r90; Mechanical 13 "S" at 43.118,34.152 h0.8 r90; Mechanical 13 "S" at 43.118,32.902 h0.8 r90; Mechanical 13 "S" at 43.118,31.627 h0.8 r90; Mechanical 13 "D" at 38.443,33.527 h0.8 r90
Q2: Mechanical 13 "G" at 45.473,32.161 h0.8 r270; Mechanical 13 "S" at 45.473,33.436 h0.8 r270; Mechanical 13 "S" at 45.473,34.686 h0.8 r270; Mechanical 13 "S" at 45.473,35.961 h0.8 r270; Mechanical 13 "D" at 50.148,34.061 h0.8 r270